# EAGLE board PIC32 (EAGLE 9.3.0)

Size 100 x 100 mm. Coordinates in mm from the lower left corner, seen from the top.
Outline: 0,0 100,0 100,100 0,100 0,0
Copper layers (1*16): Top 0.035mm / dielectric 1.5mm / Bottom 0.035mm
Design rules "default": minimum track width 6mil, minimum drill 0.35mm, track to track 6mil, track to pad 6mil, pad to pad 6mil, via to via 6mil, smd to smd 6mil, copper to edge 40mil, drill to drill 6mil, minimum pad ring 10mil, minimum via ring 8mil, stop-mask expansion 4mil, vias tented up to drill 0mil, thermal gap 10mil

## Footprints (pad centres in the part's own frame; a part is rotated, then mirrored left to right if it is on the bottom)
C025-025X050 = drill 0.813 octagon: 1 -1.27,0; 2 1.27,0
B45181B = drill 0.813: + -2.54,0 | drill 0.813 octagon: - 2.54,0
USB-MICROB-PTH-MILL = smd 0.4 x 1.75: D+ 0,0; D- -0.65,0; GND 1.3,0; ID 0.65,0; VBUS -1.3,0 | smd 2 x 1.46: SHIELD -2.9,0.275; SHIELD2 2.9,0.275 | smd 1.425 x 2.5: SHIELD3 -0.963,-2.675; SHIELD4 0.963,-2.675 | smd 1.4 x 2.1 bottom: SHIELD5 -2.731,-2.531; SHIELD7 2.729,-2.531 | smd 1 x 1: SHIELD6 2.7,-2.575 | smd 1.1 x 1.5: SHIELD8 -2.731,-2.731 | smd 1 x 1.3 bottom: SHIELD9 -2.43,0.195; SHIELD10 2.43,0.195
LED3MM = drill 0.813 octagon: A -1.27,0; K 1.27,0
0207/10 = drill 0.813 octagon: 1 -5.08,0; 2 5.08,0
TQFP44 = smd 1.5 x 0.5: 1 -5.8,4; 2 -5.8,3.2; 3 -5.8,2.4; 4 -5.8,1.6; 5 -5.8,0.8; 6 -5.8,0; 7 -5.8,-0.8; 8 -5.8,-1.6; 9 -5.8,-2.4; 10 -5.8,-3.2; 11 -5.8,-4; 23 5.8,-4; 24 5.8,-3.2; 25 5.8,-2.4; 26 5.8,-1.6; 27 5.8,-0.8; 28 5.8,0; 29 5.8,0.8; 30 5.8,1.6; 31 5.8,2.4; 32 5.8,3.2; 33 5.8,4 | smd 0.5 x 1.5: 12 -4,-5.8; 13 -3.2,-5.8; 14 -2.4,-5.8; 15 -1.6,-5.8; 16 -0.8,-5.8; 17 0,-5.8; 18 0.8,-5.8; 19 1.6,-5.8; 20 2.4,-5.8; 21 3.2,-5.8; 22 4,-5.8; 34 4,5.8; 35 3.2,5.8; 36 2.4,5.8; 37 1.6,5.8; 38 0.8,5.8; 39 0,5.8; 40 -0.8,5.8; 41 -1.6,5.8; 42 -2.4,5.8; 43 -3.2,5.8; 44 -4,5.8
SLIDE = drill 0.8: 1 -2,0; 2 0,0; 3 2,0 | drill 1: P$1 -4,0; P$2 4,0
L4931 = drill 1.016 pad 1.88: 1.VIN -2.54,0; 2.GND 0,0; 3.VOUT 2.54,0
PB = drill 1.016 pad 1.88: 1 -2.54,0; 2 2.54,0
1X03 = drill 1.016 pad 1.88: 1 0,0; 2 2.54,0; 3 5.08,0
1X08 = drill 1.016 pad 1.88: 1 0,0; 2 2.54,0; 3 5.08,0; 4 7.62,0; 5 10.16,0; 6 12.7,0; 7 15.24,0; 8 17.78,0
1X05 = drill 1.016 pad 1.88: 1 0,0; 2 2.54,0; 3 5.08,0; 4 7.62,0; 5 10.16,0

## Placement (x,y rotation side)
C1  0.1uF  [C025-025X050]  72.39,57.15 0 top
C2  0.1uF  [C025-025X050]  46.99,36.83 0 top
C3  10uF  [B45181B]  48.26,88.9 270 top
C4  0.1uF  [C025-025X050]  27.94,85.09 270 top
C5  0.1uF  [C025-025X050]  39.37,87.63 270 top
C6  10uF  [B45181B]  35.56,48.26 90 top
C7  0.1uF  [C025-025X050]  50.55,61.09 180 top
J1  [USB-MICROB-PTH-MILL]  15.24,91.44 180 top
LED1  RED  [LED3MM]  85.09,87.63 0 top
LED2  GREEN  [LED3MM]  74.93,76.2 90 top
R1  330  [0207/10]  80.01,85.09 90 top
R2  330  [0207/10]  78.74,93.98 180 top
R3  10k  [0207/10]  45.72,12.7 180 top
R4  10k  [0207/10]  92.71,80.01 180 top
U$1  PIC32MX270F256D  [TQFP44]  49.53,48.26 0 top
U$2  SLIDE  [SLIDE]  6.35,83.82 90 top
U$3  L4931  [L4931]  26.67,93.98 90 top
U$4  RESET  [PB]  34.29,7.62 0 top
U$5  USER  [PB]  92.71,92.71 90 top
U$6  8MHz OSC  [1X03]  62.23,48.26 90 top
U$7  CONN_08  [1X08]  91.44,40.64 90 top
U$8  CONN_08  [1X08]  6.35,41.91 90 top
U$9  SNAP  [1X05]  46.99,5.08 0 top

## Library data of the parts
C1-C7 = PIC32; SPICEPREFIX: C
J1 = PIC32; PROD_ID: CONN-13711
LED1 LED2 U$1-U$9 = PIC32
R1-R4 = PIC32; SPICEPREFIX: R

## Nets
+3V3: C1.1 C2.2 C3.+ C5.1 C7.2 LED1.A R3.2 R4.2 U$1.10 U$1.17 U$1.28 U$1.40 U$3.3.VOUT U$7.7 U$9.2
+5V: C4.2 U$1.42 U$2.3 U$3.1.VIN U$8.7
A0: U$1.19 U$7.1
A1: U$1.20 U$7.2
A4: LED2.A U$1.34 U$7.6
B2: U$1.23 U$7.3
B3: U$1.24 U$7.4
B4: R4.1 U$1.33 U$5.1 U$7.5
B7: U$1.43 U$8.6
B8: U$1.44 U$8.5
B9: U$1.1 U$8.4
B13: U$1.11 U$8.3
B14: U$1.14 U$8.2
B15: U$1.15 U$8.1
D+: J1.D+ U$1.8
D-: J1.D- U$1.9
GND: C1.2 C2.1 C3.- C4.1 C5.2 C6.- C7.1 J1.GND R1.1 R2.1 U$1.6 U$1.16 U$1.29 U$1.39 U$3.2.GND U$4.2 U$5.2 U$6.2 U$7.8 U$8.8 U$9.3
MCLR: R3.1 U$1.18 U$4.1 U$9.1
N$1: U$1.30 U$6.1
N$2: J1.VBUS U$2.2
N$3: LED1.K R1.2
N$4: U$1.31 U$6.3
N$5: C6.+ U$1.7
N$6: LED2.K R2.2
PGC: U$1.22 U$9.5
PGD: U$1.21 U$9.4
USBID: J1.ID U$1.41

## Tracks (layer width: path | path; a pad name or v marks a point on that pad's centre or on a via)
+3V3  (14 unrouted)
+5V  (4 unrouted)
A0  (1 unrouted)
A1  (1 unrouted)
A4  (2 unrouted)
B2  (1 unrouted)
B3  (1 unrouted)
B4  (3 unrouted)
B7  (1 unrouted)
B8  (1 unrouted)
B9  (1 unrouted)
B13  (1 unrouted)
B14  (1 unrouted)
B15  (1 unrouted)
D+  (1 unrouted)
D-  (1 unrouted)
GND  (20 unrouted)
MCLR  (3 unrouted)
N$1  (1 unrouted)
N$2  (1 unrouted)
N$3  (1 unrouted)
N$4  (1 unrouted)
N$5  (1 unrouted)
N$6  (1 unrouted)
PGC  (1 unrouted)
PGD  (1 unrouted)
USBID  (1 unrouted)